# EAGLE board BaroMeter (EAGLE 5.11)
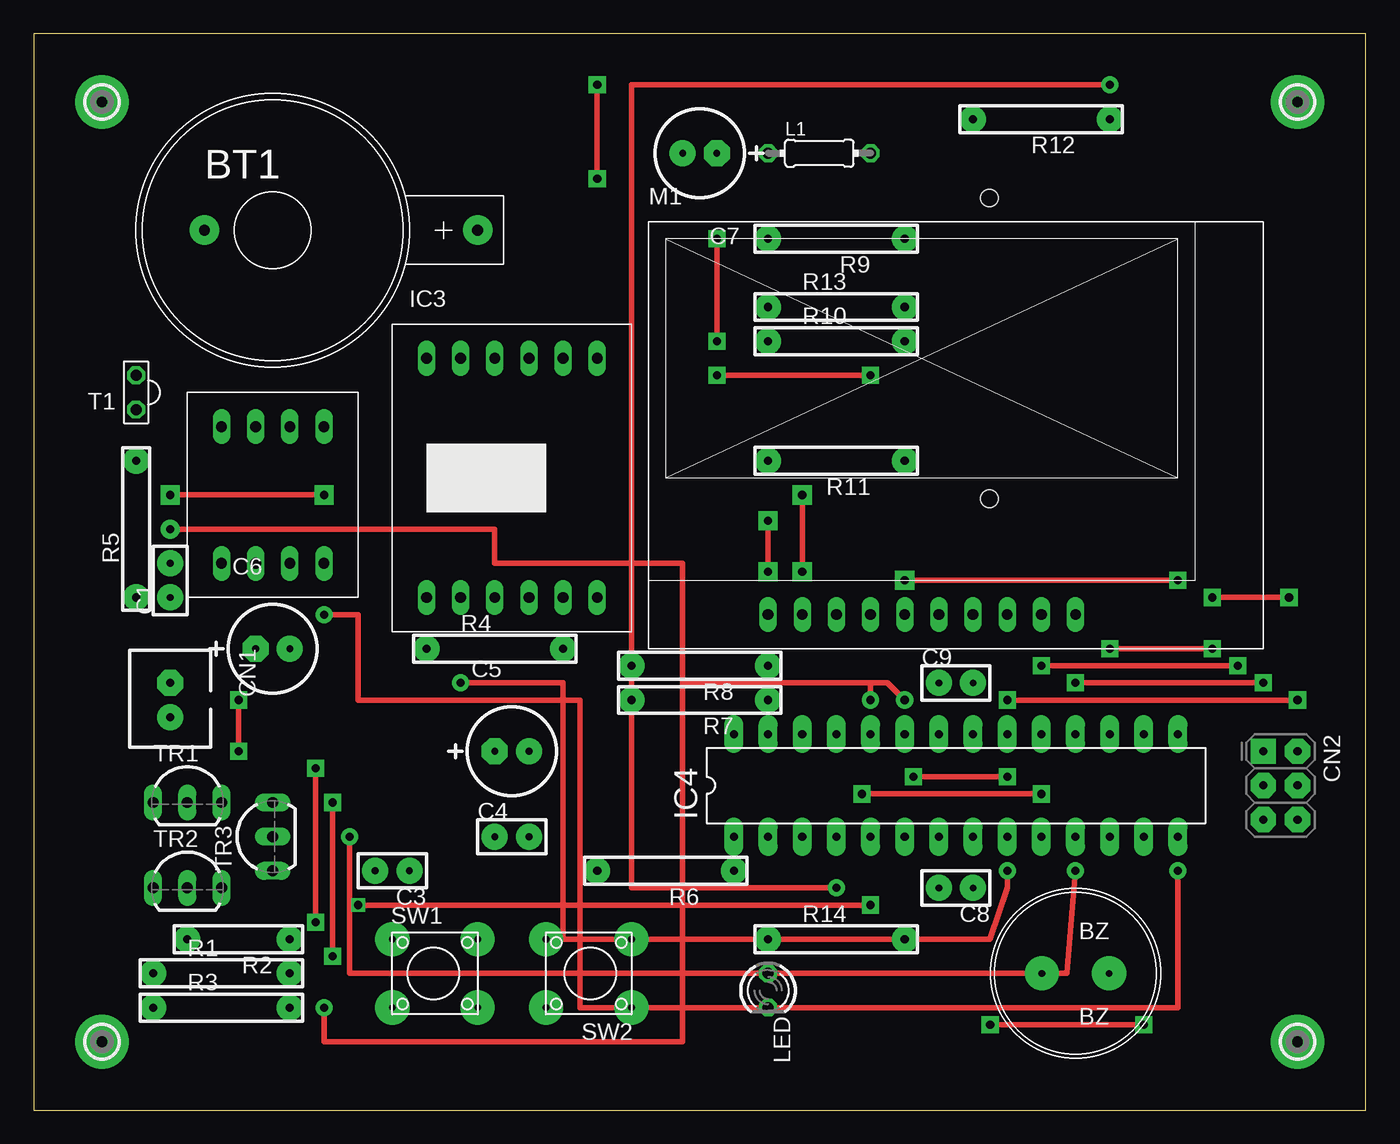
[diagram p0: board, top side]
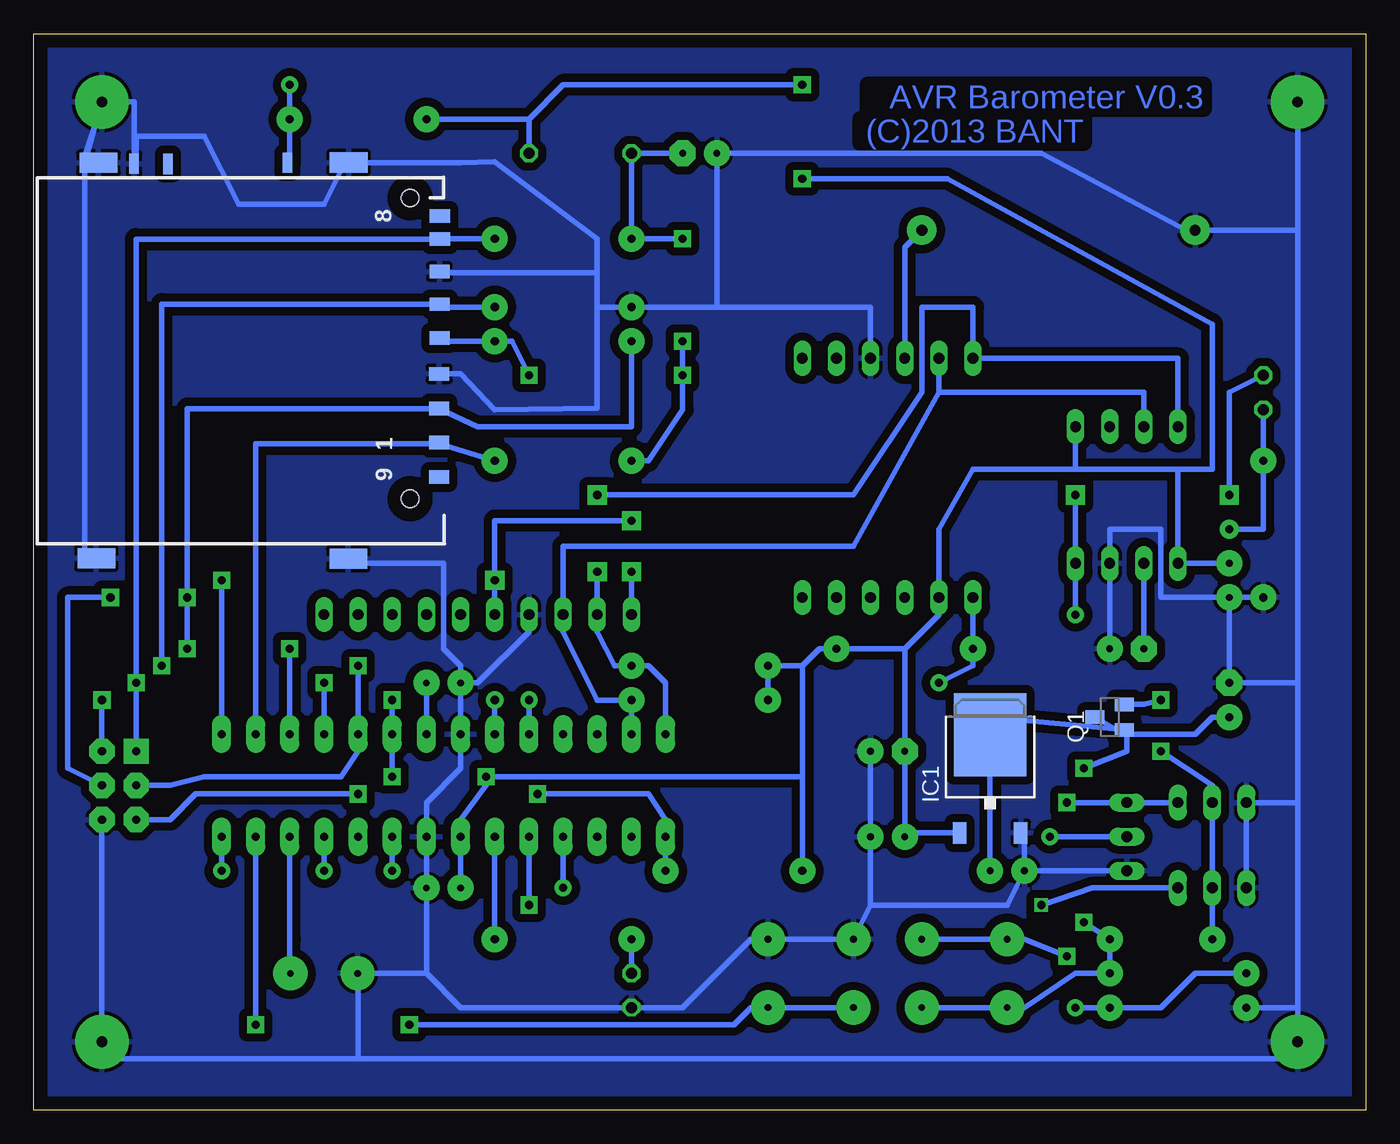
[diagram p1: board, bottom side, seen from below]

Size 99.06 x 80.01 mm. Coordinates in mm from the lower left corner, seen from the top.
Outline: 0,0 99.06,0 99.06,80.01 0,80.01 0,0
Copper layers (1*16): Top 0.035mm / dielectric 1.5mm / Bottom 0.035mm
Design rules "default": minimum track width 10mil, minimum drill 24mil, track to track 8mil, track to pad 8mil, pad to pad 8mil, via to via 8mil, smd to smd 8mil, copper to edge 40mil, drill to drill 8mil, minimum pad ring 10mil, minimum via ring 8mil, stop-mask expansion 4mil, vias tented up to drill 0mil, thermal gap 10mil

## Footprints (pad centres in the part's own frame; a part is rotated, then mirrored left to right if it is on the bottom)
CH25-2032 = drill 0.813 pad 2.184 round: P$1 15.24,0; P$2 -5.08,0
XXXX = drill 0.5 pad 2.54 round: P$1 -2.5,0; P$2 2.5,0
CAP_DIP_1 = drill 0.5 pad 1.93 round: 1 -1.27,0; 2 1.27,0
CCAP_6.5 = drill 0.5 pad 1.93 octagon: + -1.27,0 | drill 0.5 pad 1.93 round: - 1.27,0
CON_HRS_DIP_2 = drill 0.6 pad 1.93 octagon: 1 -1.27,0 | drill 0.6 pad 1.93 round: 2 1.27,0
2X3-NS = drill 0.6 pad 1.88 square: 1 -2.54,-1.27 | drill 0.6 pad 1.88 octagon: 2 -2.54,1.27; 3 0,-1.27; 4 0,1.27; 5 2.54,-1.27; 6 2.54,1.27
DM1A-DSF-PEJ = smd 1 x 1.5: 1 6.263,16.174; 2 3.738,16.174; 3 1.161,16.178; 4 -1.516,16.205; 5 -4.016,16.205; 6 -6.44,16.205; 7 -8.865,16.231; 8 -10.565,16.231; 9 8.814,16.174 | smd 1.5 x 0.7: COM_TERM -14.462,-6.502; DETECT -14.532,4.902; WRT_PROT -14.437,-3.988 | smd 1.5 x 2.8: GND1 14.895,9.427; GND2 -14.549,9.452; GND3 -14.523,-9.152; GND4 14.859,-9.305 | hole 1.295: -11.913,14.021; 10.439,14.021
TO252 = smd 1 x 1.6: 1 -2.28,-4.8; 2 2.28,-4.8 | smd 5.4 x 6.2: 3 0,2.5
ORG-LGA8 = drill 0.8 long: 1 -3.81,-5.08; 2 -1.27,-5.08; 3 1.27,-5.08; 4 3.81,-5.08; 5 3.81,5.08; 6 1.27,5.08; 7 -1.27,5.08; 8 -3.81,5.08
ORG-DS3231 = drill 0.8 long: 1 -6.35,-8.89; 2 -3.81,-8.89; 3 -1.27,-8.89; 4 1.27,-8.89; 5 3.81,-8.89; 6 6.35,-8.89; 7 6.35,8.89; 8 3.81,8.89; 9 1.27,8.89; 10 -1.27,8.89; 11 -3.81,8.89; 12 -6.35,8.89
DIL28-3 = drill 0.6 pad 1.422 long: 1 -16.51,-3.81; 2 -13.97,-3.81; 3 -11.43,-3.81; 4 -8.89,-3.81; 5 -6.35,-3.81; 6 -3.81,-3.81; 7 -1.27,-3.81; 8 1.27,-3.81; 9 3.81,-3.81; 10 6.35,-3.81; 11 8.89,-3.81; 12 11.43,-3.81; 13 13.97,-3.81; 14 16.51,-3.81; 15 16.51,3.81; 16 13.97,3.81; 17 11.43,3.81; 18 8.89,3.81; 19 6.35,3.81; 20 3.81,3.81; 21 1.27,3.81; 22 -1.27,3.81; 23 -3.81,3.81; 24 -6.35,3.81; 25 -8.89,3.81; 26 -11.43,3.81; 27 -13.97,3.81; 28 -16.51,3.81
0204/7 = drill 0.813 octagon: 1 -3.81,0; 2 3.81,0
LED3MM = drill 0.813 octagon: A -1.27,0; K 1.27,0
TOG_SB1602B = drill 0.8 long: 1 -13.97,-12.7; 2 -11.43,-12.7; 3 -8.89,-12.7; 4 -6.35,-12.7; 5 -3.81,-12.7; 6 -1.27,-12.7; 7 1.27,-12.7; 8 3.81,-12.7; 9 6.35,-12.7; 10 8.89,-12.7
PAD-2.1 = drill 0.8 pad 4 round: B2,1 0,0
SOT23 = smd 1 x 1.4: 1 -0.95,-1.1; 2 0.95,-1.1; 3 0,1.1
R_0.125W_4 = drill 0.6 pad 1.93 round: 1 -5.08,0; 2 5.08,0
R_0.125W_3 = drill 0.6 pad 1.93 round: 1 -3.81,0; 2 3.81,0
B3F-10X = drill 0.5 pad 2.54 round: 1 -1.27,2.54; 2 5.08,2.54; 3 -1.27,-2.54; 4 5.08,-2.54
OPTO-TRANS-SIEMENS_LPT80A = drill 0.813 octagon: C 0,-1.27; E 0,1.27
TO92 = drill 0.813 long: B 2.54,0; C 0,0; E -2.54,0

## Placement (x,y rotation side)
BT1  3V  [CH25-2032]  17.78,65.41 0 top
BZ  BZ  [XXXX]  77.47,10.16 180 top
C1  0.1u  [CAP_DIP_1]  10.16,39.37 90 top
C3  0.1uF  [CAP_DIP_1]  26.67,17.78 180 top
C4  0.1uF  [CAP_DIP_1]  35.56,20.32 0 top
C5  4.7uF  [CCAP_6.5]  35.56,26.67 0 top
C6  1u  [CCAP_6.5]  17.78,34.29 0 top
C7  4.7u  [CCAP_6.5]  49.53,71.12 180 top
C8  0.1u  [CAP_DIP_1]  68.58,16.51 180 top
C9  0.1u  [CAP_DIP_1]  68.58,31.75 0 top
CN1  BATT  [CON_HRS_DIP_2]  10.16,30.48 270 top
CN2  AVR-ISP-6NS  [2X3-NS]  92.71,24.13 270 top
CON1  DM1A-DSF-PEJ  [DM1A-DSF-PEJ]  85.09,55.88 270 bottom
IC1  NJU7223DL1-33  [TO252]  27.94,25.4 0 bottom
IC2  MPL115A2  [ORG-LGA8]  17.78,45.72 0 top
IC3  DS3231  [ORG-DS3231]  35.56,46.99 0 top
IC4  ATMega328P  [DIL28-3]  68.58,24.13 0 top
L1  10uH  [0204/7]  58.42,71.12 0 top
LED  RED  [LED3MM]  54.61,8.89 270 top
M1  ST7032i  [TOG_SB1602B]  68.58,49.53 0 top
MP1  MOUNT-PAD2.1  [PAD-2.1]  5.08,5.08 0 top
MP2  MOUNT-PAD2.1  [PAD-2.1]  93.98,5.08 0 top
MP3  MOUNT-PAD2.1  [PAD-2.1]  5.08,74.93 0 top
MP4  MOUNT-PAD2.1  [PAD-2.1]  93.98,74.93 0 top
Q1  DMG3415U  [SOT23]  19.05,29.21 90 bottom
R1  1M  [R_0.125W_4]  13.97,10.16 0 top
R2  100K  [R_0.125W_3]  15.24,12.7 180 top
R3  1M  [R_0.125W_4]  13.97,7.62 0 top
R4  10K  [R_0.125W_4]  34.29,34.29 0 top
R5  10K  [R_0.125W_4]  7.62,43.18 90 top
R6  10K  [R_0.125W_4]  46.99,17.78 180 top
R7  4K7  [R_0.125W_4]  49.53,30.48 180 top
R8  4K7  [R_0.125W_4]  49.53,33.02 180 top
R9  47K  [R_0.125W_4]  59.69,64.77 180 top
R10  47K  [R_0.125W_4]  59.69,57.15 0 top
R11  47K  [R_0.125W_4]  59.69,48.26 180 top
R12  1M  [R_0.125W_4]  74.93,73.66 180 top
R13  47K  [R_0.125W_4]  59.69,59.69 0 top
R14  1K  [R_0.125W_4]  59.69,12.7 0 top
SW1  TACT-SW  [B3F-10X]  27.94,10.16 0 top
SW2  TACT-SW  [B3F-10X]  43.18,10.16 180 top
T1  NJL7502L  [OPTO-TRANS-SIEMENS_LPT80A]  7.62,53.34 180 top
TR1  DTC124ES  [TO92]  11.43,22.86 0 top
TR2  DTC124ES  [TO92]  11.43,16.51 0 top
TR3  DTC124ES  [TO92]  17.78,20.32 90 top

## Library data of the parts
BT1 = battery
BZ = buzzer
C1 C3-C9 CN1 MP1-MP4 R1-R14 SW1 SW2 = MyLib
CN2 = atmel
CON1 = sd-card
IC1 IC2 IC4 M1 Q1 TR1-TR3 = bant
IC3 = bant2
L1 = rcl
LED = led
T1 = bant; OC_FARNELL: unknown; OC_NEWARK: unknown

## Nets
32KHZ: IC3.1 IC4.9 R4.1
!CS: CON1.1 IC4.16 R11.1
BATT: IC4.23 R1.1 R3.2
DETECT: CON1.DETECT IC4.4 R12.1
GND: BT1.P$2 BZ.P$2 C1.1 C3.2 C4.2 C5.- C6.- C7.- C8.1 C9.1 CN1.1 CN2.6 CON1.3 CON1.6 CON1.COM_TERM CON1.GND1 CON1.GND2 CON1.GND3 CON1.GND4 IC1.2 IC2.3 IC3.9 IC4.8 IC4.22 LED.K M1.4 MP1.B2,1 MP2.B2,1 MP3.B2,1 MP4.B2,1 R3.1 R5.1 R13.1 SW2.3 SW2.4 TR1.E TR2.E TR3.E
LCD_PW: IC4.15 M1.1 M1.5
MISO: CN2.1 CON1.7 IC4.18 R9.1
MOSI: CN2.4 CON1.2 IC4.17 R10.1
N$1: Q1.2 R2.2 TR1.C TR2.C
N$2: SW1.1 SW1.2 TR1.B TR3.B
N$3: CN1.2 Q1.3 R1.2 R2.1 SW1.3 SW1.4
N$4: BT1.P$1 IC3.10
N$5: C3.1 IC1.3 Q1.1
N$6: C6.+ IC2.2
N$7: C9.2 IC4.21
N$8: IC4.13 SW2.1 SW2.2
N$9: BZ.P$1 IC4.12
N$10: LED.A R14.1
N$11: IC4.6 R14.2
N$14: C7.+ CON1.4 L1.1 R9.2 R10.2 R11.2
OPT: IC4.24 R5.2 T1.E
POWER: IC4.5 TR2.B
RESET: CN2.5 IC4.1 R6.1
SCL: IC2.8 IC3.12 IC4.28 M1.2 R8.1
SCLK: CN2.3 CON1.5 IC4.19 R13.2
SDA: IC2.7 IC3.11 IC4.27 M1.3 R7.1
SENSOR_PW: IC2.4 IC4.14 T1.C
SW1: IC4.11 TR3.C
VCC: C1.2 C4.1 C5.+ C8.2 CN2.2 IC1.1 IC2.1 IC2.5 IC3.2 IC4.7 IC4.20 L1.2 R4.2 R6.2 R7.2 R8.2 R12.2

## Tracks (layer width: path | path; a pad name or v marks a point on that pad's centre or on a via)
32KHZ  (via drill 0.6 pad 1.27)
  Top 0.406: v31.75,31.75 39.37,31.75 39.37,12.7 71.12,12.7 72.39,16.51 v72.39,17.78
  Bottom 0.406: IC3.1 R4.1 29.21,33.02 v31.75,31.75 | v72.39,17.78 IC4.9
!CS
  Bottom 0.406: 68.92,49.53 R11.1 | 68.92,49.53 CON1.1 | 68.92,49.53 82.55,49.53 IC4.16
BATT  (via drill 0.6 pad 1.27)
  Top 0.406: v21.59,7.62 21.59,5.08 48.26,5.08 48.26,31.75 63.5,31.75 v64.77,30.48
  Bottom 0.406: R1.1 12.7,10.16 15.24,7.62 R3.2 v21.59,7.62 | v64.77,30.48 IC4.23
DETECT  (via drill 0.6 pad 1.27)
  Top 0.406: v80.01,76.2 44.45,76.2 44.45,16.51 v59.69,16.51
  Bottom 0.406: v59.69,16.51 IC4.4 | CON1.DETECT 80.01,70.41 R12.1 v80.01,76.2
GND
  Bottom 0.254: 95.25,40.64 CON1.GND4 93.98,40.64 | 95.25,69.85 CON1.GND3 95.25,71.12 MP4.B2,1
  Bottom 0.406: C3.2 25.4,20.32 25.66,20.32 IC1.2 | 5.08,7.62 R3.1 | 5.08,7.62 5.08,22.86 | TR2.E TR1.E 5.08,22.86 | C1.1 CN1.1 5.08,31.75 | C1.1 R5.1 | 5.08,7.62 MP1.B2,1 6.35,5.08 6.35,3.81 74.93,3.81 | 74.93,3.81 93.98,3.81 CN2.6 | C6.- IC2.3 19.05,43.18 15.24,43.18 15.24,38.1 C1.1 | C9.1 IC4.22 67.31,25.4 69.85,22.86 IC4.8 C8.1 69.85,10.16 | 57.15,62.23 68.89,62.23 CON1.6 | 36.83,15.24 C4.2 C5.- | C3.2 26.67,15.24 36.83,15.24 | C3.2 TR3.E | 95.25,69.85 95.25,40.64 | 57.15,62.23 57.15,64.77 64.77,70.48 67.31,70.43 CON1.GND2 75.64,69.85 76.2,69.85 77.47,67.31 83.82,67.31 86.36,72.39 91.44,72.39 91.44,70.34 CON1.COM_TERM 91.59,74.93 MP4.B2,1 95.25,70.4 CON1.GND3 | CON1.3 67.31,54.72 64.77,52.07 57.15,52.18 57.15,59.69 | 57.15,59.69 57.15,62.23 | CON1.GND1 75.66,40.64 68.58,40.64 68.58,34.29 67.31,33.02 C9.1 | 57.15,59.69 R13.1 48.26,59.69 | 48.26,59.69 36.83,59.69 IC3.9 | 48.26,59.69 C7.- 24.13,71.12 13.34,65.41 BT1.P$2 5.08,65.41 | 36.83,15.24 SW2.4 SW2.3 45.72,12.7 50.8,7.62 LED.K 67.31,7.62 69.85,10.16 | C9.1 66.04,31.75 62.23,35.56 M1.4 | 5.08,22.86 5.08,31.75 | 5.08,31.75 5.08,65.41 | 5.08,65.41 MP3.B2,1 | 74.93,10.16 BZ.P$2 | 74.93,3.81 74.93,10.16 | 74.93,10.16 69.85,10.16
  pour Bottom (isolate 0.61): 0,80.01 0,0 99.06,0 99.06,80.01
LCD_PW  (via drill 0.6 pad 1.27, 0.6 pad 1.42)
  Top 0.406: v54.61,40.01 v54.61,43.81 | v64.77,39.37 v85.09,39.37
  Bottom 0.406: M1.5 v64.77,39.37 64.77,43.81 v54.61,43.81 | M1.1 v54.61,40.01 | v85.09,39.37 IC4.15
MISO  (via drill 0.6 pad 1.27)
  Top 0.406: v77.47,31.75 v91.44,31.75
  Bottom 0.406: R9.1 68.86,64.77 CON1.7 91.44,64.75 v91.44,31.75 CN2.1 | IC4.18 v77.47,31.75
MOSI  (via drill 0.6 pad 1.27)
  Top 0.406: v87.63,34.29 v80.01,34.29 | v87.63,38.1 v93.34,38.1
  Bottom 0.406: R10.1 54.61,50.8 66.04,50.8 CON1.2 87.63,52.14 v87.63,38.1 v87.63,34.29 | v80.01,34.29 IC4.17 | CN2.4 96.52,25.4 96.52,38.1 v93.34,38.1
N$1  (via drill 0.6 pad 1.27)
  Top 0.406: v15.24,26.67 v15.24,30.48
  Bottom 0.406: Q1.2 16.51,30.16 v15.24,30.48 | v15.24,26.67 11.43,24.13 TR1.C TR2.C R2.2
N$2  (via drill 0.6 pad 1.27)
  Top 0.406: v22.23,11.43 v22.23,22.86
  Bottom 0.406: TR1.B TR3.B v22.23,22.86 | v22.23,11.43 25.4,12.7 SW1.1 SW1.2
N$3  (via drill 0.6 pad 1.27)
  Top 0.406: v20.95,13.97 v20.95,25.4
  Bottom 0.406: CN1.2 11.43,29.21 12.7,27.94 17.78,27.94 | Q1.3 17.95,27.94 17.78,27.94 | SW1.4 SW1.3 25.4,7.62 21.59,10.16 R1.2 R2.1 v20.95,13.97 | 17.78,27.94 17.78,26.67 v20.95,25.4
N$4
  Bottom 0.406: IC3.10 34.29,64.14 BT1.P$1
N$5
  Bottom 0.406: Q1.1 27.94,29.21 IC1.3 C3.1
N$6
  Bottom 0.406: C6.+ IC2.2
N$7
  Bottom 0.406: IC4.21 C9.2
N$8  (via drill 0.6 pad 1.27)
  Top 0.406: v71.12,6.35 v82.55,6.35
  Bottom 0.406: SW2.2 SW2.1 45.72,7.62 46.99,6.35 v71.12,6.35 | v82.55,6.35 IC4.13
N$9
  Bottom 0.406: BZ.P$1 80.01,12.7 IC4.12
N$10
  Bottom 0.406: LED.A R14.1
N$11
  Bottom 0.406: R14.2 IC4.6
N$14  (via drill 0.6 pad 1.27)
  Top 0.406: v50.8,57.15 v50.8,64.77 | v50.8,54.61 v62.23,54.61
  Bottom 0.406: C7.+ L1.1 R9.2 v50.8,64.77 | CON1.4 68.89,57.15 R10.2 63.5,57.15 v62.23,54.61 | v50.8,57.15 v50.8,54.61 50.8,52.07 53.34,48.26 R11.2
OPT  (via drill 0.6 pad 1.27, 0.6 pad 1.42)
  Top 0.406: v10.16,43.18 34.29,43.18 34.29,40.64 48.26,40.64 48.26,31.75 62.23,31.75 v62.23,30.48
  Bottom 0.406: T1.E R5.2 7.62,43.18 v10.16,43.18 | v62.23,30.48 IC4.24
POWER  (via drill 0.6, 0.6 pad 1.27)
  Top 0.406: v24.13,15.24 v62.23,15.24
  Bottom 0.406: TR2.B 20.32,16.51 v24.13,15.24 | v62.23,15.24 IC4.5
RESET  (via drill 0.6 pad 1.27)
  Top 0.406: v61.59,23.5 v74.93,23.5
  Bottom 0.406: R6.1 IC4.1 52.07,21.59 53.34,23.5 v61.59,23.5 | CN2.5 88.9,21.59 87,23.5 v74.93,23.5
SCL  (via drill 0.6 pad 1.42)
  Top 0.406: v57.15,45.72 v57.15,40.01
  Bottom 0.406: IC4.28 52.07,31.75 53.34,33.02 R8.1 55.88,33.02 57.15,35.56 M1.2 v57.15,40.01 | IC2.8 13.97,55.88 IC3.12 29.21,59.69 33.02,59.69 33.02,53.34 38.1,45.72 v57.15,45.72
SCLK  (via drill 0.6 pad 1.27)
  Top 0.406: v74.93,33.02 v89.53,33.02
  Bottom 0.406: R13.2 68.89,59.69 CON1.5 89.53,59.9 v89.53,33.02 | v74.93,33.02 IC4.19 74.93,26.67 76.2,24.77 86.36,24.77 88.9,24.13 CN2.3
SDA
  Bottom 0.406: IC4.27 R7.1 57.15,30.48 59.69,35.56 M1.3 59.69,41.91 38.1,41.91 31.75,53.34 | IC2.7 16.51,53.34 31.75,53.34 | 31.75,53.34 IC3.11
SENSOR_PW  (via drill 0.6 pad 1.27, 0.6 pad 1.42)
  Top 0.406: v21.59,45.72 v10.16,45.72 | v21.59,36.83 24.13,36.83 24.13,30.48 40.64,30.48 40.64,7.62 85.09,7.62 v85.09,17.78
  Bottom 0.406: T1.C 10.16,53.34 v10.16,45.72 | v21.59,45.72 IC2.4 v21.59,36.83 | v85.09,17.78 IC4.14
SW1  (via drill 0.6 pad 1.27)
  Top 0.406: v23.5,20.32 23.5,10.16 76.83,10.16 v77.47,17.78
  Bottom 0.406: v23.5,20.32 TR3.C | v77.47,17.78 IC4.11
VCC  (via drill 0.6 pad 1.27)
  Top 0.406: v65.41,24.77 v72.39,24.77 | v41.91,69.22 v41.91,76.2 | v72.39,30.48 v93.98,30.48
  Bottom 0.406: C8.2 IC4.7 67.31,21.59 65.41,24.13 v65.41,24.77 41.91,24.77 | IC1.1 34.29,20.6 C4.1 C5.+ 34.29,34.29 | C1.2 IC2.1 13.97,47.62 | 34.29,34.29 R4.2 40.64,34.29 41.91,33.02 | 34.29,34.29 31.75,36.83 IC3.2 31.75,43.18 29.21,47.62 21.59,47.62 | v72.39,24.77 IC4.20 v72.39,30.48 | 41.91,24.77 R6.2 | 41.91,33.02 41.91,24.77 | R7.2 R8.2 41.91,33.02 | 21.59,47.62 IC2.5 | 21.59,47.62 13.97,47.62 | 62.23,73.66 R12.2 | 62.23,73.66 L1.2 | 62.23,73.66 59.69,76.2 v41.91,76.2 | v41.91,69.22 31.11,69.22 11.43,58.42 11.43,47.62 13.97,47.62 | v93.98,30.48 CN2.2

## Text on the board
Bottom: AVR Barometer V0.3 | (C)2013 BANT